# Altium PCB OnePieceBoard_kkk.PcbDoc
Units mil, origin at the board's own origin, x right, y up, seen from the top; angles counter-clockwise.
Board outline 5140 x 7450 mil, 2 copper layers (Top Layer, Bottom Layer); 128 components, 63 nets, 384 pads, 30 vias.
Unrouted connection lines stored in the file: 17.
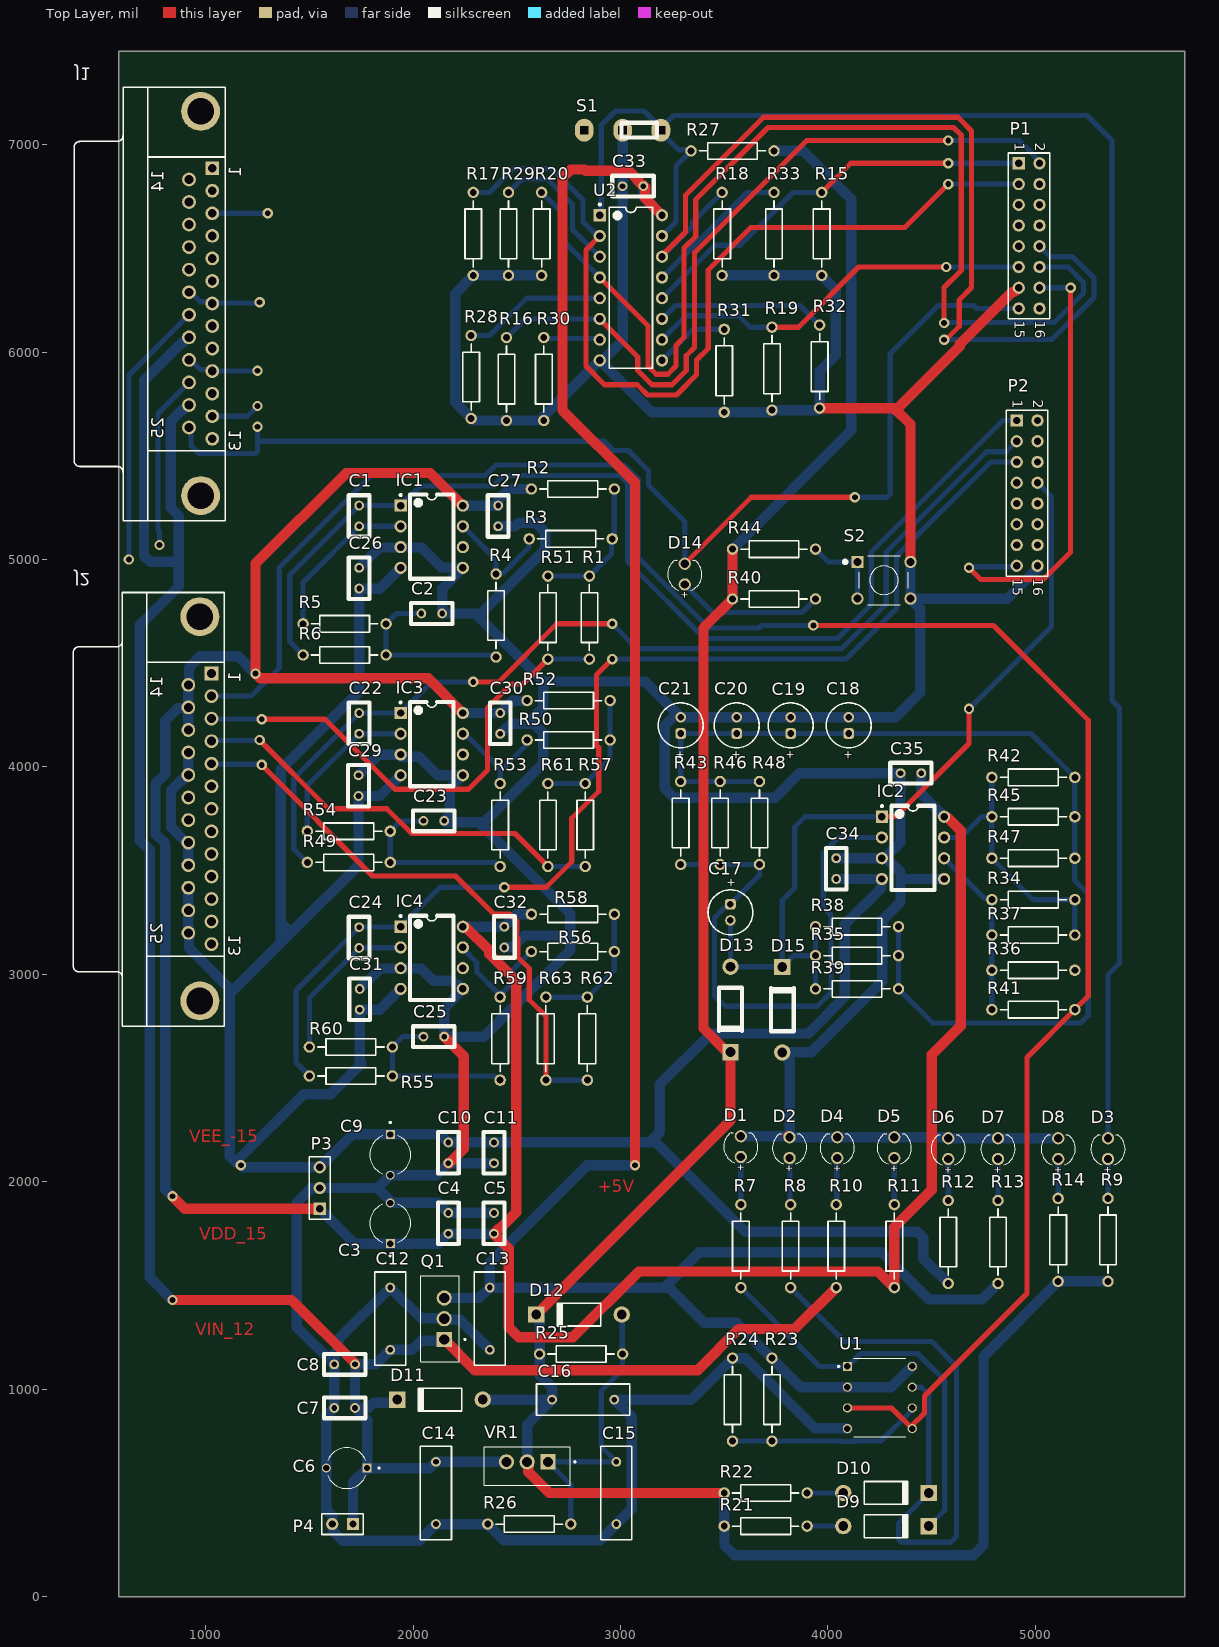
[diagram p0: Top Layer view]
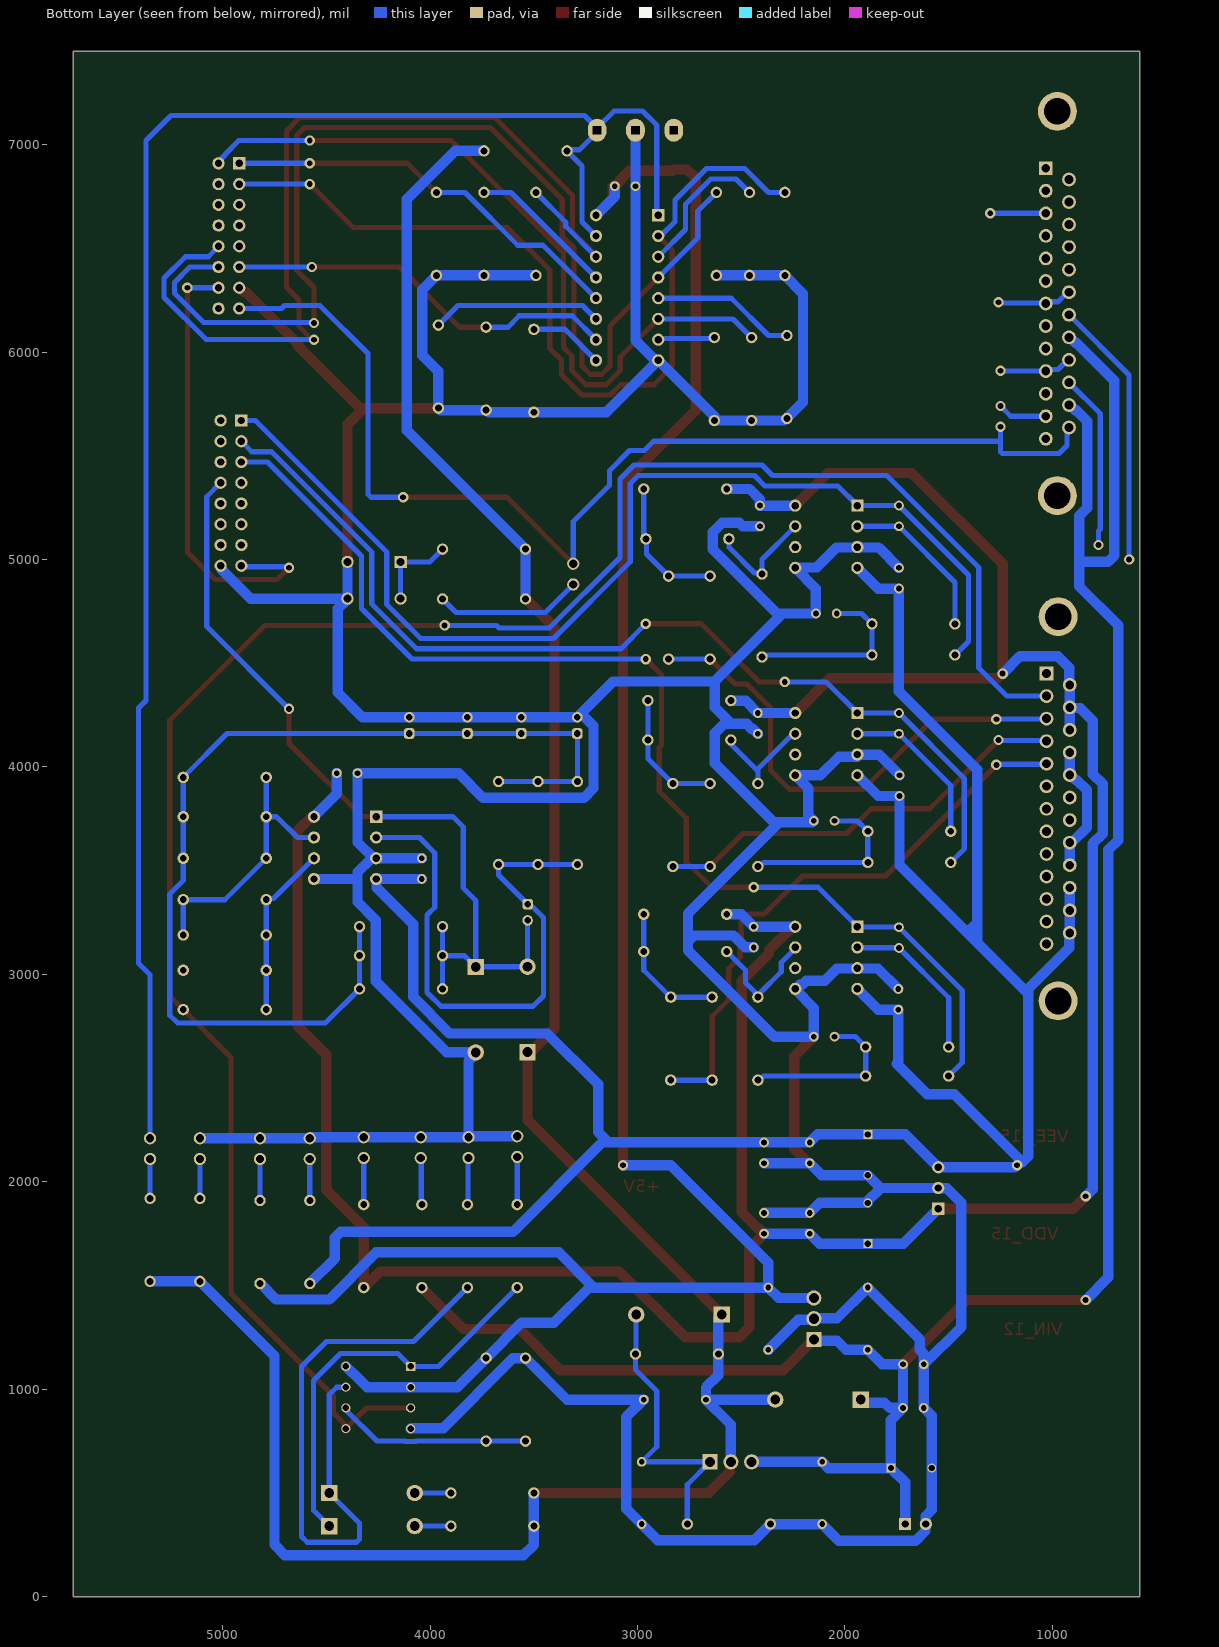
[diagram p1: Bottom Layer view, seen from below]

## Layer stack, top to bottom
Top Solder: solder mask 0.4, Solder Resist, Dk 3.5
Top Layer: signal copper 1.4
Dielectric 1: dielectric 12.6, FR-4, Dk 4.8
Bottom Layer: signal copper 1.4
Bottom Solder: solder mask 0.4, Solder Resist, Dk 3.5

## Board outline
580,0 5720,0 5720,7450 580,7450

## Design rules (kind name [scope] priority, off if disabled: settings)
AcuteAngle [All] p1: minimum=6.00000000000000E+0001 checktracksonly=FALSE
Clearance [All] p1: gap=25 ignorepadtopadclearanceinfootprint=FALSE
PolygonConnect [All] p1: connectstyle=Relief reliefconductorwidth=10 reliefentries=4 polygonreliefangle="90 Angle" airgapwidth=10
RoomDefinition pwm_buffers_fault_sig [InComponentClass('pwm_buffers_fault_sig')] p1: confinementstyle=ConfineIn formatcopy=TRUE lockcomponents=FALSE outline 3168.58,4650 4580,4650 4580,5150 3168.58,5150
RoomDefinition vdc_signal_adaptation [InComponentClass('vdc_signal_adaptation')] p2: confinementstyle=ConfineIn formatcopy=TRUE lockcomponents=FALSE outline 3174.06,2446.26 5494.06,2446.26 5494.06,4601.26 3174.06,4601.26
RoomDefinition "PWM Drivers" [InComponentClass('PWM Drivers')] p3: confinementstyle=ConfineIn formatcopy=TRUE lockcomponents=FALSE outline 2080,5545 4170,5545 4170,7240 2080,7240
RoomDefinition current_signal_adaptation_2 [InComponentClass('current_signal_adaptation_2')] p4: confinementstyle=ConfineIn formatcopy=TRUE lockcomponents=FALSE outline 1390,3460 3040,3460 3040,4450 1390,4450
RoomDefinition current_signal_adaptation_3 [InComponentClass('current_signal_adaptation_3')] p5: confinementstyle=ConfineIn formatcopy=TRUE lockcomponents=FALSE outline 1400,2430 3030,2430 3030,3420 1400,3420
RoomDefinition "Connector 2" [InComponentClass('Connector 2')] p6: confinementstyle=ConfineIn formatcopy=TRUE lockcomponents=FALSE outline 350,2680 1180,2680 1180,4960 350,4960
RoomDefinition connectors_headers_LEDs [InComponentClass('connectors_headers_LEDs')] p7: confinementstyle=ConfineIn formatcopy=TRUE lockcomponents=FALSE outline 3425,1395 5540,1395 5540,2380 3425,2380
RoomDefinition Comparator [InComponentClass('Comparator')] p8: confinementstyle=ConfineIn formatcopy=TRUE lockcomponents=FALSE outline 3420,241 4630,241 4630,1345 3420,1345
RoomDefinition Supplies [InComponentClass('Supplies')] p9: confinementstyle=ConfineIn formatcopy=TRUE lockcomponents=FALSE outline 1390.67,240 3370,240 3370,2380 1390.67,2380
RoomDefinition current_signal_adaptation [InComponentClass('current_signal_adaptation')] p10: confinementstyle=ConfineIn formatcopy=TRUE lockcomponents=FALSE outline 1380,4470 3030,4470 3030,5460 1380,5460
RoomDefinition Header [InComponentClass('Header')] p11: confinementstyle=ConfineIn formatcopy=TRUE lockcomponents=FALSE outline 5170,7190 4760,7190 4760,4680 5170,4680
RoomDefinition "Connector 1" [InComponentClass('Connector 1')] p12: confinementstyle=ConfineIn formatcopy=TRUE lockcomponents=FALSE outline 355,5130 1190,5130 1190,7345 355,7345
RoutingVias [All] p1: holewidth=28 width=50 viastyle="Through Hole" minholewidth=28 minwidth=50 maxholewidth=28 maxwidth=50
SolderMaskExpansion [All] p1: expansion=4 istentingtop=FALSE
SupplyNets "Schematic Supply Nets_5" [InNet('VDD_15')] p1: voltage=0.000
SupplyNets "Schematic Supply Nets_4" [InNet('+5V')] p2: voltage=0.000
SupplyNets "Schematic Supply Nets_3" [InNet('GND')] p3: voltage=0.000
SupplyNets "Schematic Supply Nets_2" [InNet('3V3')] p4: voltage=0.000
SupplyNets "Schematic Supply Nets_1" [InNet('VEE_-15')] p5: voltage=0.000
SupplyNets "Schematic Supply Nets" [InNet('VIN_12')] p6: voltage=0.000
Width GND [InNet('GND')] p1: maxlimit=50 minlimit=50 preferedwidth=50 minimp=50.000000 maximp=50.000000 favimp=50.000000
Width GND_CTL [InNet('GND_CTL')] p2: maxlimit=50 minlimit=50 preferedwidth=50 minimp=50.000000 maximp=50.000000 favimp=50.000000
Width GND_SENS [InNet('GND_SENS')] p3: maxlimit=50 minlimit=50 preferedwidth=50 minimp=50.000000 maximp=50.000000 favimp=50.000000
Width Power-3V3 [InNet('3V3')] p4: maxlimit=50 minlimit=50 preferedwidth=50 minimp=50.000000 maximp=50.000000 favimp=50.000000
Width Power-5V [InNet('+5V')] p5: maxlimit=50 minlimit=50 preferedwidth=50 minimp=50.000000 maximp=50.000000 favimp=50.000000
Width Power-VIN [InNet('VIN_12')] p6: maxlimit=50 minlimit=50 preferedwidth=50 minimp=50.000000 maximp=50.000000 favimp=50.000000
Width Power-VEE [InNet('VEE_-15')] p7: maxlimit=50 minlimit=50 preferedwidth=50 minimp=50.000000 maximp=50.000000 favimp=50.000000
Width Power-VDD [InNet('VDD_15')] p8: maxlimit=50 minlimit=50 preferedwidth=50 minimp=50.000000 maximp=50.000000 favimp=50.000000
Width Signals [All] p9: maxlimit=25 minlimit=25 preferedwidth=25 minimp=50.000000 maximp=50.000000 favimp=50.000000
30 further rules are at their usual default settings.

## Components (designator, comment, footprint, x,y, rotation, side; value= is the part's Value field where it differs from the comment)
C1 "Cap No Pol" RAD-0.1 1740,5210 r90 top value=10nF
C2 "Cap No Pol" RAD-0.1 2090,4740 r0 top value=47nF
C3 "ECA2AM100B" CAPPRD500W50D500H1100 1890,1800 r90 top
C4 "Cap No Pol" RAD-0.1 2170,1800 r90 top value=1uF
C5 "Cap No Pol" RAD-0.1 2390,1800 r90 top value=1uF
C6 "ECA2AM100B" CAPPRD500W50D500H1100 1680,620 r180 top
C7 "Cap No Pol" RAD-0.1 1670,910 r180 top value=1uF
C8 "Cap No Pol" RAD-0.1 1670,1120 r180 top value=1uF
C9 "ECA2AM100B" CAPPRD500W50D500H1100 1890,2130 r270 top
C10 "Cap No Pol" RAD-0.1 2170,2140 r270 top value=1uF
C11 "Cap No Pol" RAD-0.1 2390,2140 r270 top value=1uF
C12 "Cap" RAD-0.3 1890,1340 r90 top value=0.22uF
C13 "Cap" RAD-0.3 2370,1340 r270 top value=0.1uF
C14 "Cap" RAD-0.3 2110,500 r270 top value=0.1uF
C15 "Cap" RAD-0.3 2980,500 r270 top value=1uF
C16 "Cap" RAD-0.3 2820,950 r0 top value=1uF
C17 "860020772005" WCAP-ATG5_D5H11 -46470,53299.37 r90 top
C18 "860020772005" WCAP-ATG5_D5H11 54100,-45799.37 r270 top
C19 "860020772005" WCAP-ATG5_D5H11 53820,-45799.37 r270 top
C20 "860020772005" WCAP-ATG5_D5H11 53560,-45799.37 r270 top
C21 "860020772005" WCAP-ATG5_D5H11 53290,-45799.37 r270 top
C22 "Cap No Pol" RAD-0.1 1740,4210 r90 top value=10nF
C23 "Cap No Pol" RAD-0.1 2100,3740 r0 top value=47nF
C24 "Cap No Pol" RAD-0.1 1740,3177.5 r90 top value=10nF
C25 "Cap No Pol" RAD-0.1 2100,2700 r0 top value=47nF
C26 "Cap No Pol" RAD-0.1 1740,4910 r90 top value=1uF
C27 "Cap No Pol" RAD-0.1 2410,5210 r270 top value=1uF
C29 "Cap No Pol" RAD-0.1 1737.03,3910 r90 top value=1uF
C30 "Cap No Pol" RAD-0.1 2420,4210 r270 top value=1uF
C31 "Cap No Pol" RAD-0.1 1742.5,2880 r90 top value=1uF
C32 "Cap No Pol" RAD-0.1 2440,3180 r270 top value=1uF
C33 "Cap No Pol" RAD-0.1 3060,6800 r180 top value=1uF
C34 "Cap No Pol" RAD-0.1 4040,3510 r90 top value=1uF
C35 "Cap No Pol" RAD-0.1 4400,3970 r180 top value=1uF
D1 "Bright Green, 2.1V, 40°" WL-TMRC_D3.95H5.3 3580,2170 r90 top
D2 "Bright Green, 2.1V, 40°" WL-TMRC_D3.95H5.3 3815,2165 r90 top
D3 "Super Red, 2V, 40°" WL-TMRC_D3.95H5.3 5350,2160 r90 top
D4 "Super Red, 2V, 40°" WL-TMRC_D3.95H5.3 4045,2165 r90 top
D5 "Super Red, 2V, 40°" WL-TMRC_D3.95H5.3 4320,2165 r90 top
D6 "Super Red, 2V, 40°" WL-TMRC_D3.95H5.3 4580,2160 r90 top
D7 "Super Red, 2V, 40°" WL-TMRC_D3.95H5.3 4820,2160 r90 top
D8 "Super Red, 2V, 40°" WL-TMRC_D3.95H5.3 5110,2160 r90 top
D9 "Diode 1N4001" DO-41 4280,340 r0 top
D10 "Diode 1N4001" DO-41 4280,500 r0 top
D11 "Diode 1N4001" DO-41 2130,950 r180 top
D12 "Diode 1N4001" DO-41 2800,1360 r180 top
D13 "Diode BAT54" DO-204AL 3530.32,2831.26 r270 top
D14 "Super Red, 2V, 40°" WL-TMRC_D3.95H5.3 3310,4930 r90 top
D15 "Diode BAT54" DO-204AL 3780,2830 r90 top
IC1 "OPAMP" DIP-8 2090,5110 r0 top
IC2 "OPAMP" DIP-8 4410,3610 r0 top
IC3 "OPAMP" DIP-8 2090,4110 r0 top
IC4 "OPAMP" DIP-8 2090,3080 r0 top
J1 "D Connector 25" DSUB1.385-2H25A 601.89,6234.35 r270 top
J2 "D Connector 25" DSUB1.385-2H25A 598.25,3798.11 r270 top
P1 "Header 8X2" HDR2X8 4920,6910 r270 top
P2 "Header 8X2" HDR2X8 4910,5670 r270 top
P3 "Header 3" HDR1X3 1550,1870 r90 top
P4 "Header 2" HDR1X2 1710,350 r180 top
Q1 "LM7805CT/NOPB" TO254P1054X470X1955-3#1 2150,1340 r90 top
R1 "Res1" AXIAL-0.4 2850,4720 r90 top value=100k
R2 "Res1" AXIAL-0.4 2770,5340 r0 top value=100k
R3 "Res1" AXIAL-0.4 2760,5100 r180 top value=10k
R4 "Res1" AXIAL-0.4 2400,4730 r270 top value=10k
R5 "Res1" AXIAL-0.4 1670,4690 r180 top value=6.2k
R6 "Res1" AXIAL-0.4 1670,4540 r180 top value=10k
R7 "Res1" AXIAL-0.4 3580,1690 r270 top value=10k
R8 "Res1" AXIAL-0.4 3820,1690 r270 top value=10k
R9 "Res1" AXIAL-0.4 5350,1720 r270 top value=10k
R10 "Res1" AXIAL-0.4 4040,1690 r270 top value=10k
R11 "Res1" AXIAL-0.4 4320,1690 r270 top value=10k
R12 "Res1" AXIAL-0.4 4580,1710 r270 top value=10k
R13 "Res1" AXIAL-0.4 4820,1710 r270 top value=10k
R14 "Res1" AXIAL-0.4 5110,1720 r270 top value=10k
R15 "Res1" AXIAL-0.4 3970,6570 r90 top value=1k
R16 "Res1" AXIAL-0.4 2450,5870 r90 top value=1k
R17 "Res1" AXIAL-0.4 2290,6570 r90 top value=1k
R18 "Res1" AXIAL-0.4 3490,6570 r90 top value=1k
R19 "Res1" AXIAL-0.4 3730,5920 r90 top value=1k
R20 "Res1" AXIAL-0.4 2620,6570 r90 top value=1k
R21 "Res1" AXIAL-0.4 3700,340 r180 top value=10k
R22 "Res1" AXIAL-0.4 3700,500 r180 top value=10k
R23 "Res1" AXIAL-0.4 3730,950 r90 top value=10k
R24 "Res1" AXIAL-0.4 3540,950 r270 top value=510
R25 "Res1" AXIAL-0.4 2810,1170 r180 top value=390
R26 "Res1" AXIAL-0.4 2560,350 r0 top value=620
R27 "Res1" AXIAL-0.4 3540,6970 r0 top value=10k
R28 "Res1" AXIAL-0.4 2280,5880 r90 top value=1k
R29 "Res1" AXIAL-0.4 2460,6570 r90 top value=1k
R30 "Res1" AXIAL-0.4 2630,5870 r90 top value=1k
R31 "Res1" AXIAL-0.4 3500,5910 r90 top value=1k
R32 "Res1" AXIAL-0.4 3960,5930 r90 top value=1k
R33 "Res1" AXIAL-0.4 3740,6570 r90 top value=1k
R34 "Res1" AXIAL-0.4 4990,3360 r0 top value=20k
R35 "Res1" AXIAL-0.4 4140,3090 r180 top value=12k
R36 "" AXIAL-0.4 4990,3020 r180 top value=100k
R37 "Res1" AXIAL-0.4 4990,3190 r0 top value=20k
R38 "Res1" AXIAL-0.4 4140,3230 r180 top value=13k
R39 "Res1" AXIAL-0.4 4140,2930 r180 top value=13k
R40 "Res1" AXIAL-0.4 3740,4810 r180 top value=10k
R41 "Res1" AXIAL-0.4 4990,2830 r180 top value=100k
R42 "Res1" AXIAL-0.4 4990,3950 r0 top value=12k
R43 "Res1" AXIAL-0.4 3290,3730 r270 top value=7.15k
R44 "Res1" AXIAL-0.4 3740,5050 r180 top value=10k
R45 "Res1" AXIAL-0.4 4990,3760 r0 top value=13k
R46 "Res1" AXIAL-0.4 3480,3730 r270 top value=7.15k
R47 "Res1" AXIAL-0.4 4990,3560 r0 top value=13k
R48 "Res1" AXIAL-0.4 3670,3730 r270 top value=7.15k
R49 "Res1" AXIAL-0.4 1690,3540 r180 top value=10k
R50 "Res1" AXIAL-0.4 2750,4130 r180 top value=10k
R51 "Res1" AXIAL-0.4 2650,4720 r90 top value=100k
R52 "Res1" AXIAL-0.4 2750,4320 r0 top value=100k
R53 "Res1" AXIAL-0.4 2420,3720 r270 top value=10k
R54 "Res1" AXIAL-0.4 1690,3690 r180 top value=6.2k
R55 "Res1" AXIAL-0.4 1700,2510 r180 top value=10k
R56 "Res1" AXIAL-0.4 2770,3110 r180 top value=10k
R57 "Res1" AXIAL-0.4 2830,3720 r90 top value=100k
R58 "Res1" AXIAL-0.4 2770,3290 r0 top value=100k
R59 "Res1" AXIAL-0.4 2420,2690 r270 top value=10k
R60 "Res1" AXIAL-0.4 1700,2650 r180 top value=6.2k
R61 "Res1" AXIAL-0.4 2650,3720 r90 top value=100k
R62 "Res1" AXIAL-0.4 2840,2690 r90 top value=100k
R63 "Res1" AXIAL-0.4 2640,2690 r90 top value=100k
S1 "SW-SPDT" MHDR1X3 3140,7070 r180 top
S2 "FSM8JH" SW_FSM8JH 4270,4900 r0 top
U1 "LM393N" DIP794W45P254L959H508Q8 4250,960 r0 top
U2 "CD74HC367E" N0016A 3050,6310 r0 top
VR1 "LM317T/NOPB" TO254P1054X470X1955-3#2 2550,650 r180 top

## Footprints (in the part's own frame and the unit in brackets; to place one, negate y for a bottom-side part, rotate by r counter-clockwise, add the part's x,y. Pads: shape width x height; smd on the part's side, far side on the other; paste and mask are expansions set on the pad)
AXIAL-0.4 [mm] "Axial Device, Thru-Hole; 2 Leads; 0.4 in Pin Spacing"
  round 1.4 hole 0.85: 1(-5.08,0) 2(5.08,0)
  silkscreen extent -4.06,-1.02 4.06,1.02
CAPPRD500W50D500H1100 [mm]
  round 1.1 hole 0.75: N(2.5,0)
  rect 1.1x1.1 hole 0.75: P(-2.5,0)
  silkscreen extent -4.06,-2.5 2.32,2.5, body extent -2.75,-2.5 2.75,2.5, height 11
DIP794W45P254L959H508Q8 [mm]
  rect 1.13x1.13 hole 0.78: 1(-3.97,3.81)
  round 1.13 hole 0.78: 2(-3.97,1.27) 3(-3.97,-1.27) 4(-3.97,-3.81) 5(3.97,-3.81) 6(3.97,-1.27) 7(3.97,1.27) 8(3.97,3.81)
  silkscreen extent -5.13,-4.8 3.17,4.8
DIP-8 [mm]
  rect 1.5x1.5 hole 0.9: 1(-3.81,3.81)
  round 1.5 hole 0.9: 2(-3.81,1.27) 3(-3.81,-1.27) 4(-3.81,-3.81) 5(3.81,-3.81) 6(3.81,-1.27) 7(3.81,1.27) 8(3.81,3.81)
  silkscreen extent -3.93,-5.15 2.65,5.23, body extent -3.6,-5.15 3.6,5.15, height 5.08
DO-41 [mm] "Diode, Axial; Body 5.2 x 2.7 mm (LxDia. max), Lead Dia. 0.86 mm (max)"
  round 2 hole 1.2: 1(-5.23,0)
  rect 2x2 hole 1.2: 2(5.23,0)
  silkscreen extent -2.65,-1.42 2.75,1.4
DO-204AL [mm]
  round 2 hole 1.2: 1(-5.23,0)
  rect 2x2 hole 1.2: 2(5.23,0)
  silkscreen extent -2.65,-1.4 2.75,1.4
DSUB1.385-2H25A [mm] "Connector; D Subminiature; 25 Position; Right Angle; Pitch 1.385 mm"
  rect 1.69x1.69 hole 1.09: 1(-16.566,10.92)
  round 1.69 hole 1.09: 2(-13.805,10.92) 3(-11.044,10.92) 4(-8.283,10.92) 5(-5.522,10.92) 6(-2.761,10.92) 7(0,10.92) 8(2.761,10.92) 9(5.522,10.92) 10(8.283,10.92) 11(11.044,10.92) 12(13.805,10.92) 13(16.566,10.92) 14(-15.185,8.08) 15(-12.425,8.08) 16(-9.663,8.08) 17(-6.903,8.08) 18(-4.142,8.08) 19(-1.38,8.08) 20(1.38,8.08) 21(4.142,8.08) 22(6.903,8.08) 23(9.663,8.08) 24(12.425,8.08) 25(15.185,8.08)
  round 4.76 hole 3.26: 26(-23.526,9.5) 27(23.526,9.5)
  silkscreen extent -26.5,-6 26.6,12.5
HDR1X2 [mm] "Connector; Header; 2 Position"
  rect 1.5x1.5 hole 0.9: 1(0,0)
  round 1.5 hole 0.9: 2(2.54,0)
  silkscreen extent -1.27,-1.27 3.81,1.27
HDR1X3 [mm] "Connector; Header; 3 Position"
  rect 1.5x1.5 hole 0.9: 1(0,0)
  round 1.5 hole 0.9: 2(2.54,0) 3(5.08,0)
  silkscreen extent -1.27,-1.27 6.35,1.27
HDR2X8 [mm] "Connector; Header; 8x2 Position"
  rect 1.5x1.5 hole 0.9: 1(0,0)
  round 1.5 hole 0.9: 2(0,2.54) 3(2.54,0) 4(2.54,2.54) 5(5.08,0) 6(5.08,2.54) 7(7.62,0) 8(7.62,2.54) 9(10.16,0) 10(10.16,2.54) 11(12.7,0) 12(12.7,2.54) 13(15.24,0) 14(15.24,2.54) 15(17.78,0) 16(17.78,2.54)
  silkscreen extent -1.27,-1.27 19.05,3.81
MHDR1X3 [mil]
  oval 90x110 hole 40 square: 1(-55,0) 2(130,0) 3(315,0)
  silkscreen extent -35,-35 135,35
N0016A [mm] "DIP, 16-Leads, Body 19.7x6.6mm, Pitch 2.54mm"
  rect 1.5x1.5 hole 0.9: 1(-3.81,8.89)
  round 1.5 hole 0.9: 2(-3.81,6.35) 3(-3.81,3.81) 4(-3.81,1.27) 5(-3.81,-1.27) 6(-3.81,-3.81) 7(-3.81,-6.35) 8(-3.81,-8.89) 9(3.81,-8.89) 10(3.81,-6.35) 11(3.81,-3.81) 12(3.81,-1.27) 13(3.81,1.27) 14(3.81,3.81) 15(3.81,6.35) 16(3.81,8.89)
  silkscreen extent -3.93,-9.85 2.65,10.31, body extent -3.95,-9.85 3.95,9.85, height 5.08
RAD-0.1 [mm]
  round 1.2 hole 0.7: 1(-1.27,0) 2(1.27,0)
  silkscreen extent -2.54,-1.27 2.54,1.27
RAD-0.3 [mm] "Radial Cap, Thru-Hole; 2 Leads; 0.3 in Pin Spacing"
  round 1.2 hole 0.7: 1(-3.81,0) 2(3.81,0)
  silkscreen extent -5.71,-1.91 5.71,1.9
SW_FSM8JH [mm]
  rect 1.498x1.498 / inner round 1.498 / far side rect 1.498x1.498 hole 0.99: 1(-3.25,2.25)
  round 1.498 hole 0.99: 2(-3.25,-2.25) 3(3.25,2.25) 4(3.25,-2.25)
  silkscreen extent -4.95,-3 3,3, body extent -3,-3.95 3,3.95, height 9.5
TO254P1054X470X1955-3#1 [mm]
  rect 1.86x1.86 hole 1.24: 1(-2.54,0)
  round 1.86 hole 1.24: 2(0,0) 3(2.54,0)
  silkscreen extent -5.27,-2.64 5.27,2.86
TO254P1054X470X1955-3#2 [mm]
  rect 1.86x1.86 / inner round 1.86 / far side rect 1.86x1.86 hole 1.24: 1(-2.54,0)
  round 1.86 hole 1.24: 2(0,0) 3(2.54,0)
  silkscreen extent -5.94,-1.84 5.27,2.86, body extent -5.08,-1.49 5.08,2.71, height 22.86
WCAP-ATG5_D5H11 [mm] "Aluminum Electrolytic Capacitors, 5x11mm"
  rrect50% 1.3x1.3 hole 0.8: 1(-1269,-1270)
  round 1.3 hole 0.8: 2(-1271,-1270)
  silkscreen extent -1272.75,-1272.75 -1267.25,-1267.25, body extent -1272.49,-1272.5 -1267.5,-1267.5, height 11.31
WL-TMRC_D3.95H5.3 [mm] "THT Mono-color Round Color LED, 2-leads"
  round 1.5 hole 1: 1(-1.27,0) 2(1.27,0)
  silkscreen extent -2,-2.1 1.69,2.1, body extent -1.99,-1.97 1.63,1.97, height 5.35

## Part data
C1 C2 C4 C5 C7 C8 C10 C11 C22 C23 C24 C25 C26 C27 C29 C30 C31 C32 C33 C34 C35: "Polarized Capacitor (Radial)", LatestRevisionDate=17-Jul-2002, LatestRevisionNote="Re-released for DXP Platform.", PackageDescription="Polarized Capacitor (Radial); 2 Leads", PackageReference=RB7.6-15, Published=8-Jun-2000, Publisher="Altium Limited"
C3 C6 C9: "10ÂµF 100V Aluminum Electrolytic Capacitors Radial, Can 2000 Hrs @ 85Â°C", Package="RADIAL-2 Panasonic", Check_prices=https://www.snapeda.com/parts/ECA2AM100B/Panasonic/view-part/?ref=eda, Digi-Key_Part_Number=P19556TB-ND, MF=Panasonic, MP=ECA2AM100B, SnapEDA_Link=https://www.snapeda.com/parts/ECA2AM100B/Panasonic/view-part/?ref=snap
C12 C13 C14 C15 C16: "Capacitor", LatestRevisionDate=17-Jul-2002, LatestRevisionNote="Re-released for DXP Platform.", PackageDescription="Radial Cap, Thru-Hole; 2 Leads; 0.3 in Pin Spacing", PackageReference=RAD-0.3, Published=8-Jun-2000, Publisher="Altium Limited"
C17 C18 C19 C20 C21: library part CMP-03913-53914248-1, "860020772005 Cap Aluminum Lytic 1uF 63V 20% (5 X 11mm) Radial 2mm 13mA 2000h 105C", Capacitance=1µF, Case/Package=Radial, Leakage Current=3µA, Max Operating Temperature=105°C, Min Operating Temperature=-40°C, Ripple Current=13mA, Tolerance=20%, Voltage Rating=63V, Diameter=5mm, Height=11mm, Height - Seated (Max)=12.4968mm, Lead Pitch=2.0066mm, Length=11mm, Life (Hours)=2000hours, Material=Aluminium, Mount="Through Hole", NexarPartId=53914248, Packaging="Tape & Box (TB)", Pitch=2mm, Polarity=Polar, REACH SVHC=Unknown, RoHS=Compliant, Voltage Rating (DC)=63V
D1 D2: library part 151031VS04000, "WL-TMRC Mono-color Round Color, THT, D3.95 x H5.3mm, Bright Green, 2.1V, 40°", Case/Size Code=3mm, Emitting Color="Bright Green", Forward Voltage=2.1V, Manufacturer="Wurth Elektronik", Operating Temperature Max=85°C, Operating Temperature Min=-40°C, Category="Signal LEDs", Chip Technology=AlInGaP, ComponentLink1Description="Website Link", ComponentLink1URL=https://www.we-online.com/redexpert/article/151031VS04000?ad, ComponentLink2Description="Datasheet Link", ComponentLink2URL=https://www.we-online.com/redexpert/spec/151031VS04000?ad, Diameter=3.95mm, Dominant Wavelength=570nm, Height=5.3mm, Luminous Intensity=120mcd, Manufacturer Part Number=151031VS04000, Match Code=WL-TMRC, Mount="Through Hole", Packaging=Bulk, Peak Wavelength=573nm, Viewing Angle=40°
D3 D4 D5 D6 D7 D8 D14: library part 151031SS04000, "WL-TMRC Mono-color Round Color, THT, D3.95 x H5.3mm, Super Red, 2V, 40°", Case/Size Code=3mm, Emitting Color="Super Red", Forward Voltage=2V, Manufacturer="Wurth Elektronik", Operating Temperature Max=85°C, Operating Temperature Min=-40°C, Category="Signal LEDs", Chip Technology=AlInGaP, ComponentLink1Description="Website Link", ComponentLink1URL=https://www.we-online.com/redexpert/article/151031SS04000?ad, ComponentLink2Description="Datasheet Link", ComponentLink2URL=https://www.we-online.com/redexpert/spec/151031SS04000?ad, Diameter=3.95mm, Dominant Wavelength=635nm, Height=5.3mm, Luminous Intensity=160mcd, Manufacturer Part Number=151031SS04000, Match Code=WL-TMRC, Mount="Through Hole", Packaging=Bulk, Peak Wavelength=640nm, Viewing Angle=40°
D9 D10 D11 D12: "1 Amp General Purpose Rectifier", Code_JEDEC=DO-204-AL, ComponentLink1Description="Manufacturer Link", ComponentLink1URL=http://www.fairchildsemi.com/, ComponentLink2Description=Datasheet, ComponentLink2URL=http://www.fairchildsemi.com/ds/1N%2F1N4001.pdf, DatasheetVersion=1998, LatestRevisionDate=17-Jul-2002, LatestRevisionNote="Re-released for DXP Platform.", PackageDescription="Diode, Axial; Body 5.2 x 2.7 mm (LxDia. max), Lead Dia. 0.86 mm (max)", PackageReference=DO-41, PackageVersion=Aug-1999, Published=8-Jun-2000, Publisher="Altium Limited"
D13 D15: library part "Diode 11DQ03", "Schottky Rectifier", Code_JEDEC=DO-204-AL, ComponentLink1Description="Manufacturer Link", ComponentLink1URL=http://www.irf.com/, ComponentLink2Description=Datasheet, ComponentLink2URL=http://www.irf.com/product-info/datasheets/data/11dq03.pdf, DatasheetVersion=Dec-1997, LatestRevisionDate=17-Jul-2002, LatestRevisionNote="Re-released for DXP Platform.", PackageDescription="Diode, Axial; Body 5.2 x 2.7 mm (LxDia. max), Lead Dia. 0.86 mm (max)", PackageReference=DO-204AL, Published=8-Jun-2000, Publisher="Altium Limited"
IC1 IC2 IC3 IC4: library part ADTL082, "ADTL082"
J1 J2: "Receptacle Assembly, 25 Position, Right Angle", PackageDocument=U, DatasheetDocument=19-Mar-1999, Gender=Receptacle, LatestRevisionDate=17-Jul-2002, LatestRevisionNote="Re-released for DXP Platform.", Orientation="Right Angle", PackageReference=787202, Positions=25, Published=15-Jun-2001, Publisher="Altium Limited"
P1 P2: "Header, 8-Pin, Dual row", LatestRevisionDate=17-Jul-2002, LatestRevisionNote="Re-released for DXP Platform.", Publisher="Altium Limited"
P3: "Header, 3-Pin", LatestRevisionDate=17-Jul-2002, LatestRevisionNote="Re-released for DXP Platform.", Publisher="Altium Limited"
P4: "Header, 2-Pin", LatestRevisionDate=17-Jul-2002, LatestRevisionNote="Re-released for DXP Platform.", Publisher="Altium Limited"
Q1: Package=None, Availability=Unavailable, MP=LM7805CT/NOPB, Price=None
R1 R2 R3 R4 R5 R6 R7 R8 R9 R10 R11 R12 R13 R14 R15 R16 R17 R18 R19 R20 R21 R22 R23 R24 R25 R26 R27 R28 R29 R30 R31 R32 R33 R34 R35 R37 R38 R39 R40 R41 R42 R43 R44 R45 R46 R47 R48 R49 R50 R51 R52 R53 R54 R55 R56 R57 R58 R59 R60 R61 R62 R63: "Resistor", LatestRevisionDate=17-Jul-2002, LatestRevisionNote="Re-released for DXP Platform.", PackageDescription="Axial Device, Thru-Hole; 2 Leads; 0.3 in Pin Spacing", PackageReference=AXIAL-0.3, Published=8-Jun-2000, Publisher="Altium Limited"
R36: library part Res1, "Resistor", LatestRevisionDate=17-Jul-2002, LatestRevisionNote="Re-released for DXP Platform.", PackageDescription="Axial Device, Thru-Hole; 2 Leads; 0.3 in Pin Spacing", PackageReference=AXIAL-0.3, Published=8-Jun-2000, Publisher="Altium Limited"
S1: "SPDT Subminiature Toggle Switch, Right Angle Mounting, Vertical Actuation", ComponentLink1Description="Manufacturer Link", ComponentLink1URL=http://www.apem.com, DatasheetVersion=05-Dec-2000, LatestRevisionDate=17-Dec-2003, LatestRevisionNote="Schematic revised, PCB Footprint replaced.", PackageDescription="Switch; 4 Leads", PackageReference=TL36WW15050, Published=24-Mar-1999, Publisher="Altium Limited"
S2: "Tactile Switch SPST-NO Top Actuated Through Hole", Package=None, Availability="In Stock", Check_prices=https://www.snapeda.com/parts/FSM8JH/TE+Connectivity+ALCOSWITCH+Switches/view-part/?ref=eda, MF="TE Connectivity", MP=FSM8JH, Price=None, SnapEDA_Link=https://www.snapeda.com/parts/FSM8JH/TE+Connectivity+ALCOSWITCH+Switches/view-part/?ref=snap
U1: "Low Power Low Offset Voltage Dual Comparator 8-PDIP 0 to 70", Package="PDIP-8 Texas Instruments", BuyPart=https://www.snapeda.com/parts/LM393N/NOPB/Texas%20Instruments/view-part/67776/?ref=eda, Digi-Key_Part_Number=LM393NNS/NOPB-ND, DigiKey-Purchase-URL=https://snapeda.com/shop?store=DigiKey&id=67776, MF="Texas Instruments", Mouser-Purchase-URL=https://snapeda.com/shop?store=Mouser&id=67776, MP=LM393N/NOPB, SnapEDA_Link=https://www.snapeda.com/parts/LM393N/NOPB/Texas%20Instruments/view-part/67776/?ref=snap, Texas_Instruments-Purchase-URL=https://snapeda.com/shop?store=Texas+Instruments&id=67776
U2: library part CMP-0440-00947-3, "High Speed CMOS Logic Hex Buffers/Line Drivers with Non-Inverting 3-State Outputs, N0016A, TUBE", F @ Nom Voltage(Max)(Mhz)=28, Generic Part Number=CD74HC367, ICC @ Nom Voltage(Max)(mA)=0.08, Manufacturer="Texas Instruments", Operating Temperature Range(C)="-55 to 125", Rating=Catalog, tpd @ Nom Voltage(Max)(ns)=24, Voltage(Nom)(V)=6, Bits(#)=6, Code_JEDEC=MS-001, DatasheetVersion=SCHS181D, Input Type=CMOS, Output Type=CMOS, PackageReference=N0016A, PackageVersion=http://www.ti.com/lit/ml/mpdi002c/mpdi002c.pdf, VCC(Max)(V)=6, VCC(Min)(V)=2
VR1: "1.5-A, 40-V, adjustable linear voltage regulator", Package="TO-220-3 Texas Instruments", Check_prices=https://www.snapeda.com/parts/LM317T/NOPB/Texas+Instruments/view-part/?ref=eda, MF="Texas Instruments", MP=LM317T/NOPB, SnapEDA_Link=https://www.snapeda.com/parts/LM317T/NOPB/Texas+Instruments/view-part/?ref=snap

## Via types
v1: diameter 50, hole 28, Top Layer to Bottom Layer, 30 vias

## Nets (pads, with @x,y where several pads share a name; then routed paths per layer and width w, separated by ;. In a path a pad name is that pad's centre, name@x,y a point inside that pad or via, vN(x,y) a via of type N, cw(c..) or ccw(c..) an arc to the next point about the centre after c; other vN are vias at no path point)
3V3: C16.1 D11.1 D12.2 D13.2 R9.2 R14.2 R21.2 R22.2 R25.2 R27.2 R40.2 R44.2 VR1.2 | length 12195.9
  Top Layer w50: VR1.2 2554.44,645.56 2554.44,601.62 2656.06,500 R22.2 ; D12.2 3530.32,2296.23 D13.2 3515.95,2639.72 3500.28,2639.72 3400,2740 3400,4670 R40.2 R44.2
  Bottom Layer w50: D11.1 C16.1 ; VR1.2 2550,830 C16.1 ; D12.2 2610,1344.09 R25.2 2610.98,1169.02 2610.98,1067.64 2670,1008.62 C16.1 ; R22.2 R21.2 3500.98,339.02 3500.98,249.02 3550,200 4700,200 4750,250 4750,1160 R14.2 R9.2 ; R40.2 R44.2 4112.56,5622.56 4112.56,6737.13 3879.68,6970 R27.2
3V3_MCU: P1.14 P2.15 | length 2227.3
  Top Layer w25: v1(4680,4960) 4737.03,4902.97 5037.76,4902.97 5170,5035.21 v1(5170,6310)
  Bottom Layer w25: v1(4680,4960) 4684.78,4964.78 4904.78,4964.78 P2.15 ; P1.14 v1(5170,6310)
5V_ind: D9.2 R7.2 U1.1 | length 1953.9
  Bottom Layer w25: R7.2 3960,1110 U1.1 4156.2,1172.5 4432.19,1172.5 4562.78,1041.91 4562.78,416.87 D9.2
240mV_ind: D10.2 R8.2 U1.7 | length 2926.7
  Bottom Layer w25: R8.2 4080,1230 4500,1230 4620,1110 4620,290 4592.5,262.5 4354.64,262.5 4340,277.14 4340,354.09 D10.2 4485.91,974.09 4450,1010 U1.7
+5V: C13.1 C33.1 Q1.3 R13.2 R23.2 U1.2 U1.8 U2.16 | length 11041.6
  Top Layer w50: v1(3070,2080) 3070,5369.69 2720,5719.69 2720,6840 2760,6880 2825.88,6880 2832.26,6873.62 3040.5,6873.62 3083.62,6830.5 3083.62,6826.38 C33.1 ; C33.1@3112.06,6802.06 3119.38,6794.74 3119.38,6740.62 U2.16
  Bottom Layer w50: Q1.3 2320,1440 C13.1 ; v1(3070,2080) 2840,2080 2370,1610 C13.1 ; C33.1 3110,6750 U2.16 ; U1.8 4378.54,1082.24 4376.38,1082.24 4304.13,1010 U1.2 3870,1010 R23.2 3559.51,1320.49 3403.44,1320.49 3233.93,1490 3210,1490 ; R13.2 4742.44,1432.44 4487.24,1432.44 4259.69,1660 3380,1660 3210,1490 ; C13.1 3210,1490
DCLINK_A: J2.2 R36.1 R41.1 U1.3 U1.5 | length 9834.4
  Top Layer w25: v1(3930,4682.5) 4797.5,4682.5 5255.06,4224.94 5255.06,2895.06 R41.1 4960,2600 4960,1462.01 4466.04,968.05 4466.04,885.25 4431.05,850.26 4429.82,850.26 4410.03,830.46 4410.03,813.73 U1.5 4306.3,910 U1.3
  Bottom Layer w25: J2.2 1220,4341.61 1354.94,4476.55 1354.94,4961.38 1798.62,5405.06 2349.29,5405.06 2399.29,5455.06 3017.66,5455.06 3085.06,5387.66 3085.06,5010.15 3425.21,4670 3667.97,4670 3680.47,4682.5 v1(3930,4682.5)
FAULT_T1: D14.2 J1.1 J1.7 J1.10 J1.16 J1.19 J1.22 J1.25 P1.15 | length 6262.4
  Top Layer w25: D14.2 3630,5300 v1(4130,5300)
  Bottom Layer w25: J1.25 927.95,5628.55 927.95,5603.14 930,5601.08 930,5550 968.62,5511.38 1121.38,5511.38 1241.38,5511.38 1250,5520 1250,5570 ; J1.22 927.28,5962.6 973.68,5916.2 1023.86,5916.2 J1.10 1032.69,5909.12 1249.12,5909.12 v1(1250,5910) ; J1.19 927.28,6288.7 973.68,6242.3 1023.86,6242.3 J1.7 1034.64,6237.18 1257.17,6237.18 v1(1260,6240) ; v1(1250,5640) 1250,5570 ; D14.2 3310,5182.72 3135.06,5357.66 3135.06,5428.37 3038.37,5525.06 2967.66,5525.06 2922.72,5570 1250,5570 ; v1(4130,5300) 4285.36,5300 4300,5314.64 4300,5993.23 4531.96,6225.2 4701.96,6225.2 4717.16,6210 P1.15
GND: C2.2 C3.N C4.2 C5.2 C6.N C7.2 C8.2 C9.N C10.2 C11.2 C12.2 C13.2 C14.2 C15.2 C16.2 C18.2 C19.2 C20.2 C21.2 C23.2 C25.2 C26.2 C27.2 C29.2 C30.2 C31.2 C32.2 C33.2 C34.2 C35.2 D1.2 D2.2 D4.2 D5.2 D6.2 D7.2 D8.2 D15.1 IC1.3 IC1.5 IC2.3 IC2.5 IC3.3 IC3.5 IC4.3 IC4.5 P1.13 P2.16 P3.2 P4.2 Q1.2 R15.1 R16.1 R17.1 R18.1 R19.1 R20.1 R24.1 R26.1 R28.1 R29.1 R30.1 R31.1 R32.1 R33.1 S1.2 S2.3 S2.4 U1.4 U2.8 | length 32005.4
  Top Layer w50: C25.2 2243.62,2606.38 2243.62,2159.5 2174.12,2090 C10.2 ; D2.2@3807.55,2220 3812.55,2215 D2.2 ; C19.2 C19.2@3820.23,4239.77 ; R32.1 4320,5730 4397.95,5652.05 S2.3 ; 4326.07,5720 4635,6028.93 4635,6037.47 4887.06,6289.53 4897.08,6289.53 4917.55,6310 P1.13
  Bottom Layer w50: C29.2 1835.47,4058.44 IC3.3@1938.44,4058.44 ; C26.2 1838.27,5058.27 1938.27,5058.27 IC1.3 1941.73,5058.27 2039.28,5058.27 2135.82,4961.73 2238.27,4961.73 IC1.5 2140,4860 C2.2 2299.69,4740 ; C31.2 1840.77,3028.27 1938.27,3028.27 IC4.3 1941.73,3028.27 2039.28,3028.27 2097.55,2970 2187.53,2970 2207.06,2950.47 2217.08,2950.47 2237.55,2930 IC4.5 2240,2927.55 2150,2837.55 C25.2 2340,2700 2756.85,3116.85 2756.85,3158.27 ; IC3.3@1940,4050 2028.77,4050 2118.77,3960 IC3.5 2176.36,3896.36 2176.36,3766.36 C23.2 ; C23.2@2156.36,3733.64 2316.05,3733.64 ; C13.2 2224.44,1335.56 2154.45,1335.56 Q1.2 2148.39,1341.61 2038.39,1341.61 C12.2 1640,1240 1640,1190 1620,1170 C8.2 ; C5.2 C4.2 2121.58,1898.42 C3.N 1890,1908.42 1828.42,1970 ; C11.2 C10.2 2111.58,2031.58 C9.N 1828.42,1970 ; C27.2 2492.28,5160 2509.84,5177.56 2592.13,5177.56 2637.56,5132.13 2637.56,5049.17 2328.39,4740 2299.69,4740 ; C30.2 2445,4185 2451.07,4185 2473.63,4207.56 2547.24,4207.56 ; C32.2 2480.31,3130 2537.87,3187.56 2727.56,3187.56 2756.85,3158.27 ; R20.1 R29.1 R17.1 2202.44,6282.44 2202.44,5757.56 R28.1 2281.39,5680 2291.39,5670 R16.1 R30.1 2630.98,5670.98 2630.98,5690.98 U2.8 ; S1.2 C33.2 3010,6057.53 2914.2,5961.73 2901.73,5961.73 U2.8 ; 3254.12,4239.77 3212.44,4198.1 3212.44,3897.87 3257.87,3852.44 3745.16,3852.44 3862.72,3970 C35.2 4350,3637.53 4274.2,3561.73 4261.73,3561.73 IC2.3 C34.2 ; R18.1 R33.1 R15.1 3970,6368.61 4037.56,6301.06 4037.56,5985.54 3960,5907.98 R32.1 3958.61,5730 3948.61,5720 R19.1 3728.61,5720 3718.61,5710 R31.1 3150,5710 U2.8 ; D1.2 3807.55,2220 3812.55,2215 D2.2 ; U1.4 4091.2,812.5 3937.5,812.5 3619.95,1130.05 3600.98,1149.02 3540.98,1149.02 R24.1 3340,950 C16.2 3053.62,866.38 3053.62,423.62 C15.2 2902.44,272.44 2437.56,272.44 R26.1 C14.2 2030.47,270.47 1659.76,270.47 1611.73,318.5 1611.73,348.27 P4.2 1611.73,351.73 1611.73,388.27 1581.58,418.42 C6.N 1581.58,871.57 C7.2 C8.2 ; IC2.3@4284.18,3558.27 4350,3492.45 4350,3460 ; S2.3 S2.4 ; IC2.5 4350,3460 ; P2.16 5008.27,4968.27 5008.27,4955.8 4863.89,4811.42 S2.4 ; D8.2 D7.2 D6.2 4577.55,2210 4572.55,2215 D5.2 D4.2 D2.2 ; C8.2 1440,1300 1440,1900 1508.27,1968.27 1548.27,1968.27 P3.2 1828.42,1970 ; 2299.69,4740 2627.56,4412.13 ; 2316.05,3733.64 2756.85,3292.84 2756.85,3158.27 ; 2316.05,3733.64 2343.32,3733.64 2627.56,4017.87 2627.56,4162.13 2582.13,4207.56 2547.24,4207.56 ; 2547.24,4207.56 2627.56,4287.87 2627.56,4412.13 ; 2627.56,4412.13 3117.87,4412.13 C21.2 C20.2 C19.2 C18.2 4326.07,4240 4445,4358.93 4445,4761.94 4397.95,4808.99 S2.4 ; D2.2 3815,2581.32 3780,2616.32 D15.1 3920.56,2624.09 4262.44,2965.98 4262.44,3262.13 4350,3349.69 4350,3460
GND_CTL: J1.4 J1.8 J1.11 J1.18
GND_SENS: J2.17 J2.18 J2.21 J2.22 | length 623.1
  Bottom Layer w50: J2.22 J2.21 913.19,3638.22 904.14,3638.22 833.09,3709.27 833.09,3886.95 881.87,3935.73 886.45,3935.73 911.88,3961.16 J2.18 J2.17
I1_S: C1.2 IC1.1 P2.1 R6.2 | length 5244.9
  Bottom Layer w25: R6.2 1404.94,4605.06 1404.94,4924.94 C1.2 IC1.1 2035.06,5355.06 2386.67,5355.06 2436.67,5405.06 2996.95,5405.06 3035.06,5366.95 3035.06,4989.44 3404.5,4620 4045.37,4620 4209.04,4783.67 4209.04,5036.06 4842.97,5670 P2.1
I2_S: C22.2 IC3.1 P2.3 R49.2 | length 4837.2
  Top Layer w25: v1(2290,4410) 2412.85,4410 2692.85,4690 v1(2960,4690)
  Bottom Layer w25: R49.2 1424.94,3605.06 1424.94,3944.94 C22.2 IC3.1 2090,4410 v1(2290,4410) ; v1(2960,4690) 3080,4570 4066.08,4570 4280.96,4784.89 4280.96,5037.04 4763.92,5520 4860,5520 P2.3
I3_S: C24.2 IC4.1 P2.5 R55.2 | length 5583.9
  Top Layer w25: v1(2440,3420) 2642.01,3420 2764.94,3542.93 2764.94,3752.87 2895.06,3882.99 2895.06,4092.93 2884.94,4103.05 2884.94,4444.94 v1(2960,4520)
  Bottom Layer w25: R55.2 1434.94,2575.06 1434.94,2922.44 C24.2 1741.25,3228.75 1938.75,3228.75 IC4.1 2130,3420 v1(2440,3420) ; v1(2960,4520) 4086.79,4520 4330.96,4764.18 4330.96,5016.33 4784.63,5470 P2.5
MCU_PWM1: P1.3 R17.2 U2.2 | length 4337.8
  Top Layer w25: U2.2 2832.97,6492.97 2832.97,5932.24 2922.24,5842.97 3080.82,5842.97 3130.82,5792.97 3269.18,5792.97 3367.03,5890.82 3367.03,5961.53 3423.23,6017.73 3423.23,6395.24 3628.22,6600.23 4370.23,6600.23 v1(4580,6810)
  Bottom Layer w25: R17.2 2367.99,6770 2483.05,6885.06 2667.66,6885.06 2819.21,6733.5 2819.21,6628.7 2881.4,6566.52 2893.48,6566.52 U2.2 ; v1(4580,6810) P1.3
MCU_PWM2: P1.12 R20.2 U2.4 | length 5465.2
  Top Layer w25: U2.4 3132.97,6127.03 3132.97,5997.74 3132.97,5932.24 3172.24,5892.97 3227.76,5892.97 3267.03,5932.24 3267.03,6032.24 3306.75,6071.96 3306.75,6501.25 3363.05,6557.55 3363.05,6735.06 3710.49,7082.5 4605.89,7082.5 4642.5,7045.89 4642.5,6394.11 4560,6311.61 v1(4560,6140)
  Bottom Layer w25: R20.2 2710,6680 2710,6550 U2.4 ; v1(4560,6140) 4562.97,6142.97 5091.36,6142.97 5232.5,6284.11 5232.5,6335.89 5158.39,6410 P1.12
MCU_PWM3: P1.2 R16.2 U2.6 | length 3626.2
  Top Layer w25: U2.6 3082.97,5977.03 3082.97,5911.53 3151.53,5842.97 3248.47,5842.97 3317.03,5911.53 3317.03,5982.24 3356.75,6021.96 3356.75,6478.75 3897.99,7020 v1(4580,7020)
  Bottom Layer w25: R16.2 2540,6160 U2.6 ; v1(4580,7020) 4922.09,7020 4987.03,6955.06 4987.03,6952.19 5020,6919.22 P1.2
MCU_PWM4: P1.11 R19.2 U2.10 | length 1910.6
  Top Layer w25: R19.2 3857.99,6120 4147.99,6410 v1(4570,6410)
  Bottom Layer w25: U2.10 3315.06,6175.06 3569.92,6175.06 3624.98,6120 R19.2 ; v1(4570,6410) P1.11
MCU_PWM5: P1.1 R15.2 U2.12 | length 1989.2
  Top Layer w25: R15.2 4110,6910 v1(4580,6910)
  Bottom Layer w25: U2.12 3455.38,6515.38 3577.38,6515.38 3832.01,6770 R15.2 ; v1(4580,6910) P1.1
MCU_PWM6: P1.10 R18.2 U2.14 | length 4627.9
  Top Layer w25: U2.14 3200,6465.21 3313.05,6578.26 3313.05,6755.77 3689.78,7132.5 4626.6,7132.5 4692.5,7066.6 4692.5,6310.89 4632.7,6251.09 4632.7,6124.31 4573.17,6064.78 4564.78,6064.78 v1(4560,6060)
  Bottom Layer w25: U2.14 3346.38,6606.38 3346.38,6626.38 R18.2 ; v1(4560,6060) 5079.1,6060 5282.5,6263.4 5282.5,6356.6 5179.1,6460 5070,6460 P1.10
NetC1_1: C1.1 IC1.2 R5.2 | length 781.8
  Bottom Layer w25: R5.2 1470,4890 C1.1 IC1.2
NetC2_1: C2.1 R4.2 R5.1 R6.1 | length 874.9
  Bottom Layer w25: C2.1 1920.52,4740 1870.52,4690 R5.1 R6.1 2381.85,4540 2391.85,4530 R4.2
NetC15_1: C15.1 D12.1 R25.1 R26.2 VR1.1 | length 1459.7
  Bottom Layer w25: R26.2 2760,540 VR1.1 C15.1 2907.5,722.5 2907.5,991.73 3010,1094.23 R25.1 3007.95,1172.05 3007.95,1357.95 D12.1
NetC17_1: C17.1 IC2.2 R43.2 R46.2 R48.2 | length 2721
  Bottom Layer w25: R43.2 R46.2 R48.2 3670,3478.74 C17.1 3517.09,3325.83 3506.61,3325.83 3453.45,3272.67 3453.45,2896.55 3503.79,2846.21 3948.22,2846.21 4015.06,2913.05 4015.06,3285.69 3977.5,3323.25 3977.5,3585.89 4051.61,3660 IC2.2
NetC18_1: C18.1 C19.1 C20.1 C21.1 R35.1 R38.1 R39.1 R42.2 R43.1 R45.2 R46.1 R47.2 R48.1 | length 5089.6
  Top Layer w25: C21.1 C21.1@3292.5,4163.76 ; C20.1@3557.5,4158.76 C20.1 C20.1@3562.5,4158.76 ; C19.1 C19.1@3825,4156.26
  Bottom Layer w25: R48.1 R46.1 R43.1 C21.1 C20.1 C19.1 C18.1 4978.74,4161.26 R42.2 R45.2 R47.2 5190,3452.01 5255.06,3386.95 5255.06,2803.05 5216.95,2764.94 4505.06,2764.94 R39.1 R35.1 R38.1
NetC22_1: C22.1 IC3.2 R54.2 | length 770.1
  Bottom Layer w25: R54.2@1490,3693.46 1490,3910 C22.1 IC3.2
NetC23_1: C23.1 R49.1 R53.2 R54.1 | length 869
  Bottom Layer w25: C23.1 1940,3740 R54.1 R49.1 2391.85,3540 2411.85,3520 R53.2
NetC24_1: C24.1 IC4.2 R60.2 | length 777.9
  Bottom Layer w25: R60.2 1500,2887.5 C24.1 1741.25,3128.75 1938.75,3128.75 IC4.2
NetC25_1: C25.1 R55.1 R59.2 R60.1 | length 839
  Bottom Layer w25: C25.1 1950,2700 R60.1 R55.1 2391.85,2510 2411.85,2490 R59.2
NetD1_1: D1.1 R7.1 | length 230
  Bottom Layer w25: R7.1 D1.1
NetD2_1: D2.1 R8.1 | length 227.1
  Bottom Layer w25: D2.1 3817.5,2112.5 3817.5,1892.5 R8.1
NetD3_1: D3.1 R9.1 | length 190
  Bottom Layer w25: R9.1 D3.1
NetD4_1: D4.1 R10.1 | length 227.1
  Bottom Layer w25: R10.1 4042.5,1892.5 4042.5,2112.5 D4.1
NetD5_1: D5.1 R11.1 | length 225
  Bottom Layer w25: R11.1 D5.1
NetD6_1: D6.1 R12.1 | length 200
  Bottom Layer w25: R12.1 D6.1
NetD7_1: D7.1 R13.1 | length 200
  Bottom Layer w25: R13.1 D7.1
NetD8_1: D8.1 R14.1 | length 190
  Bottom Layer w25: R14.1 D8.1
NetD9_1: D9.1 R21.1 | length 174.1
  Bottom Layer w25: R21.1 D9.1
NetD10_1: D10.1 R22.1 | length 174.1
  Bottom Layer w25: R22.1 D10.1
NetD14_1: D14.1 R40.1 | length 712.9
  Bottom Layer w25: D14.1 3445.06,4744.94 3874.94,4744.94 R40.1
NetIC1_7: IC1.7 R3.2 R4.1 | length 550.1
  Bottom Layer w25: IC1.7 2400,5000 R4.1 2405.76,4935.76 2435.76,4935.76 2559,5059 2559,5099 R3.2
NetIC2_6: IC2.6 R34.1 R36.2 R37.1 R41.2 | length 842.8
  Bottom Layer w25: IC2.6 4754.24,3365.76 4784.24,3365.76 R34.1 R37.1 R36.2 R41.2
NetIC3_7: IC3.7 R50.2 R53.1 | length 521.4
  Bottom Layer w25: IC3.7 2249.22,4160 2266.24,4142.97 2267.03,4142.97 2420,3990 2420,3980 R53.1 ; 2422.02,3982.02 2544.24,4104.24 2544.24,4124.24 R50.2
NetIC4_7: IC4.7 R56.2 R59.1 | length 596.7
  Bottom Layer w25: IC4.7 2240,3124.79 2307.03,3057.76 2307.03,3012.97 2404.94,2915.06 2404.94,2913.21 R59.1@2420,2898.15 ; R56.2 2480,3020 2480,2960 2435.06,2915.06 2435.06,2913.21 R59.1@2420,2898.15 ; R59.1@2420,2898.15 R59.1 R59.1@2420,2898.15
NetR1_2: R1.2 R2.2 R3.1 R51.2 | length 669.7
  Bottom Layer w25: R51.2 R1.2 2956.79,5026.79 2956.79,5096.79 R3.1 2960,5108.15 2970,5118.15 R2.2
NetR23_1: R23.1 R24.2 U1.6 | length 930.5
  Bottom Layer w25: R24.2 R23.1 4065.31,750 4067.81,747.5 4119.59,747.5 4122.09,750 4256.3,750 U1.6@4406.3,900
NetR50_1: R50.1 R52.2 R57.2 R61.2 | length 629.7
  Bottom Layer w25: R61.2 R57.2 2950,4040 R50.1 R52.2
NetR56_1: R56.1 R58.2 R62.2 R63.2 | length 653.8
  Bottom Layer w25: R63.2 R62.2 2970,3020 R56.1 R58.2
OUT_I_U: J2.3 R1.1 R51.1 | length 2398.8
  Top Layer w25: v1(1270,4230) 1575.21,4230 1912.24,3892.97 2267.76,3892.97 2358.88,3984.09 2358.88,4285.32 2473.34,4399.78 2529.78,4399.78 R51.1
  Bottom Layer w25: J2.3 1029.63,4231.46 1268.54,4231.46 v1(1270,4230) ; R51.1 R1.1
OUT_I_V: J2.4 R57.1 R61.1 | length 2056.9
  Top Layer w25: v1(1260,4130) 1591.12,3798.88 1873.13,3798.88 1993.13,3678.88 2491.12,3678.88 R61.1
  Bottom Layer w25: J2.4 1031.06,4127.11 1257.11,4127.11 v1(1260,4130) ; R61.1 R57.1
OUT_I_W: J2.5 R62.1 R63.1 | length 2812.8
  Top Layer w25: v1(1270,4010) 1805.06,3474.94 2205.06,3474.94 2388.88,3291.12 2465.32,3291.12 2501.12,3255.32 2501.12,3204.68 2498.58,3202.14 2498.58,3181.42 2504.94,3175.06 2504.94,3083.05 2560.06,3027.93 2560.06,2877.93 2640,2797.99 R63.1
  Bottom Layer w25: J2.5 1030.93,4012.76 1267.24,4012.76 v1(1270,4010) ; R63.1 R62.1
PWM_IND_b: D3.2 R27.1 S1.1 U2.1 U2.15 | length 8554.3
  Bottom Layer w25: U2.1 2907.5,6667.5 2907.5,7094.17 2975.83,7162.5 3112.5,7162.5 S1.1@3195,7080 ; U2.15 3267.03,6627.03 3267.03,6897.03 R27.1 3334.24,6975.76 3279.24,6975.76 3195,7060 S1.1 S1.1@3195,7080 ; D3.2 5350,2998.52 5405.38,3053.9 5405.38,4284.62 5370,4320 5370,7019.42 5249.42,7140 3255,7140 S1.1@3195,7080
PWM_T1: J1.3 R29.2 U2.3 | length 962.3
  Bottom Layer w25: J1.3 v1(1299.15,6669.15) v1@1300,6670 ; R29.2 2525.06,6835.06 2646.95,6835.06 2769.21,6712.79 2769.21,6590.79 U2.3
PWM_T2: J1.20 R28.2 U2.5 | length 1994.7
  Bottom Layer w25: v1(630,5000) 630,5890 J1.20 ; R28.2 2367.99,6080 2547.99,6260 U2.5
PWM_T3: J1.14 R30.2 U2.7 | length 274.1
  Bottom Layer w25: R30.2 2635,6065 2895,6065 U2.7
PWM_T4: J1.23 R31.2 U2.9 | length 1211.5
  Bottom Layer w25: v1(777.5,5070) 777.5,5137.21 769.71,5145 769.71,5703.6 J1.23 ; U2.9 3350,6110 R31.2
PWM_T5: J1.17 R32.2 U2.11 | length 826.3
  Bottom Layer w25: U2.11 3265.06,6225.06 3864.94,6225.06 R32.2
PWM_T6: J1.12 R33.2 U2.13 | length 948.4
  Bottom Layer w25: J1.12 1200.85,5690.85 v1(1250,5740) ; U2.13 3610,6770 R33.2
RESET: J1.2 R44.1 S2.1 S2.2 | length 404.7
  Bottom Layer w25: R44.1 4001.42,4988.58 S2.1 S2.2
VDC_S: C17.2 D13.1 D15.2 IC2.1 P2.8 R35.2 R38.2 R39.2 | length 4100.3
  Top Layer w25: IC2.1 4260.59,3760.59 4327.03,3760.59 4680,4113.56 v1@4680,4270
  Bottom Layer w25: C17.2 3530.16,3259.84 3530.16,3037.33 D13.1 3778.74,3037.17 D15.2 ; R39.2 R35.2 ; R38.2 R35.2 ; IC2.1 3890,3760 3840,3710 3840,3416.39 3780,3356.39 D15.2 ; v1(4680,4280) 5077.03,4677.03 5077.03,5302.97 P2.8 ; D15.2 3834.09,3090 R35.2
VDD_15: C3.P C4.1 C5.1 C27.1 C30.1 C32.1 C35.1 IC1.8 IC2.8 IC3.8 IC4.8 J2.14 J2.15 J2.16 P3.1 R2.1 R11.2 R52.1 R58.1 | length 15616.5
  Top Layer w50: v1(840,1930) 900,1870 P3.1 ; IC4.8 2241.73,3228.27 2254.2,3228.27 2366.38,3116.09 2366.38,3099.5 2497.56,2968.32 2497.56,1853.44 2420.49,1776.38 2416.38,1776.38 C5.1 2462.01,1677.99 2462.01,1297.99 2510,1250 2769.52,1250 3087.08,1567.56 4242.44,1567.56 R11.2 4320,1780.31 4500.47,1960.79 4500.47,2612.87 4639.53,2751.93 4639.53,3692.94 4574.2,3758.27 4561.73,3758.27 IC2.8 ; IC3.8 2072.56,4427.44 1262.56,4427.44 v1(1240,4450) 1240,4980 1677.09,5417.09 2082.91,5417.09 IC1.8
  Bottom Layer w50: v1(840,1930) 805,1965 805,3631.29 758.09,3678.2 758.09,3918.02 805,3964.93 805,4223.7 865.4,4284.1 913.19,4284.1 J2.15 ; J2.16 J2.15 ; v1(1240,4450) 1156.42,4533.58 974.19,4533.58 919.52,4478.91 919.52,4399.13 J2.14 J2.15 ; P3.1 1718.43,1701.57 C3.P 2121.57,1701.57 C4.1 C5.1 ; IC4.8 C32.1 2499.02,3289.02 2569.02,3289.02 R58.1 ; IC3.8 C30.1 2479.02,4319.02 2549.02,4319.02 R52.1 ; IC1.8 C27.1 2410,5290 2460,5340 R2.1 ; C35.1 4450,3870 IC2.8
VEE_-15: C9.P C10.1 C11.1 C26.1 C29.1 C31.1 C34.1 IC1.4 IC2.4 IC3.4 IC4.4 J2.23 J2.24 J2.25 P3.3 R12.2 | length 12412.6
  Bottom Layer w50: J2.23 J2.24 J2.25 919.52,3197.09 919.52,3127.86 1115.96,2931.41 1115.96,2124.04 1145,2095 ; 1128.69,2918.69 1365,3155 ; IC4.4 1840,2830 C31.1 1742.5,2577.5 1750,2570 1602.44,2422.44 1472.44,2422.44 1160,2110 1160,2090 v1(1170,2080) 1180,2070 P3.3 1708.43,2228.43 C9.P 2131.58,2228.43 C10.1 C11.1 3140,2190 ; IC3.4 1840,3860 C29.1 1737.03,3527.03 1415,3205 ; IC1.4 1840,4860 C26.1 1740,4364.12 1362.44,3986.56 1362.44,3250 ; C34.1 IC2.4 4258.27,3458.27 4258.27,3418.27 4081.69,3241.69 4081.69,2891.3 3905.12,2714.72 3434.72,2714.72 3190,2470 3190,2240 3140,2190 ; R12.2 4460,1630 4460,1730.71 4430.71,1760 3600.31,1760 3170.31,2190 3140,2190 ; 1362.44,3250 1362.44,3157.56 1365,3155 ; 1362.44,3250 1407.44,3205 1415,3205 ; 1365,3155 1415,3205
VIN_12: C6.P C7.1 C8.1 C12.1 C14.1 D11.2 J1.6 J1.15 J1.21 J1.24 P4.1 Q1.1 R10.2 VR1.3 | length 11175.5
  Top Layer w50: v1(840,1430) 1414.12,1430 1720,1124.12 C8.1 ; Q1.1 2297.56,1092.44 3372.76,1092.44 3571.05,1290.73 3840.73,1290.73 R10.2
  Bottom Layer w50: v1(840,1430) 730,1540 730,3600.23 683.09,3647.14 683.09,4683.09 870,4870 870,4990 ; J1.24 915.53,5745.2 890.09,5719.76 885.51,5719.76 832.21,5666.46 832.21,5248.61 870,5210.81 870,4990 ; J1.21 915.53,6071.3 890.09,6045.87 885.51,6045.87 702.5,5862.86 702.5,5019.29 731.79,4990 870,4990 ; P4.1 1710,551.57 C6.P ; D11.2 1909.72,935.63 1809.72,935.63 1784.09,910 C7.1 ; Q1.1 2143.39,1233.39 2038.39,1233.39 1995,1190 C12.1 1820,1120 C8.1 C7.1 ; VR1.3 C14.1 2080,620 C6.P ; C7.1 1778.43,851.57 C6.P
Vsa_out: IC2.7 R34.2 R37.2 R42.1 R45.1 R47.1 | length 1314.3
  Bottom Layer w25: IC2.7 4640,3660 4740,3760 R45.1 ; R42.1 R45.1 ; R37.2 R34.2 4990,3360 R47.1 R45.1
pads on no net: IC1.6 IC3.6 IC4.6 J1.5 J1.9 J1.13 J1.26 J1.27 J2.1 J2.6 J2.7 J2.8 J2.9 J2.10 J2.11 J2.12 J2.13 J2.19 J2.20 J2.26 J2.27 P1.4 P1.5 P1.6 P1.7 P1.8 P1.9 P1.16 P2.2 P2.4 P2.6 P2.7 P2.9 P2.10 P2.11 P2.12 P2.13 P2.14 S1.3

## Other copper
Top Layer:
  text "VEE_-15" at 920,2190 h60
  text "+5V" at 2890,1950 h60
  text "VDD_15" at 970,1720 h60
  text "VIN_12" at 950,1260 h60

## Text inside footprints (layer, text, board x,y; h text height)
C17: Top Overlay "+" at 3549.68,3419.45 h39.37 r90
C18: Top Overlay "+" at 4080.32,4080.55 h39.37 r270
C19: Top Overlay "+" at 3800.32,4080.55 h39.37 r270
C20: Top Overlay "+" at 3540.32,4080.55 h39.37 r270
C21: Top Overlay "+" at 3270.32,4080.55 h39.37 r270
D1: Top Overlay "+" at 3593.78,2049.92 h31.5 r90
D2: Top Overlay "+" at 3828.78,2044.92 h31.5 r90
D3: Top Overlay "+" at 5363.78,2039.92 h31.5 r90
D4: Top Overlay "+" at 4058.78,2044.92 h31.5 r90
D5: Top Overlay "+" at 4333.78,2044.92 h31.5 r90
D6: Top Overlay "+" at 4593.78,2039.92 h31.5 r90
D7: Top Overlay "+" at 4833.78,2039.92 h31.5 r90
D8: Top Overlay "+" at 5123.78,2039.92 h31.5 r90
D14: Top Overlay "+" at 3323.78,4809.92 h31.5 r90
J1: Top Overlay "13" at 1171.77,5626.44 h59.06 r90; Top Overlay "25" at 797.76,5685.71 h59.06 r90; Top Overlay "14" at 797.76,6876.5 h59.06 r90; Top Overlay "1" at 1171.77,6896.4 h59.06 r90
J2: Top Overlay "1" at 1168.13,4460.16 h59.06 r90; Top Overlay "13" at 1168.13,3190.2 h59.06 r90; Top Overlay "14" at 794.11,4440.26 h59.06 r90; Top Overlay "25" at 794.11,3249.47 h59.06 r90
P1: Top Overlay "16" at 5000,6150 h50 r270; Top Overlay "15" at 4900,6150 h50 r270; Top Overlay "1" at 4900,7010 h50 r270; Top Overlay "2" at 5000,7010 h50 r270
P2: Top Overlay "16" at 4990,4910 h50 r270; Top Overlay "15" at 4890,4910 h50 r270; Top Overlay "1" at 4890,5770 h50 r270; Top Overlay "2" at 4990,5770 h50 r270